# Altium PCB SolarSenseSlave.PcbDoc (part 2 of 2)
Units mm, origin at the board's own origin, x right, y up, seen from the top; angles counter-clockwise.
Board outline 120 x 80 mm, 2 copper layers (Top Layer, Bottom Layer); 75 components, 36 nets, 195 pads, 65 vias.
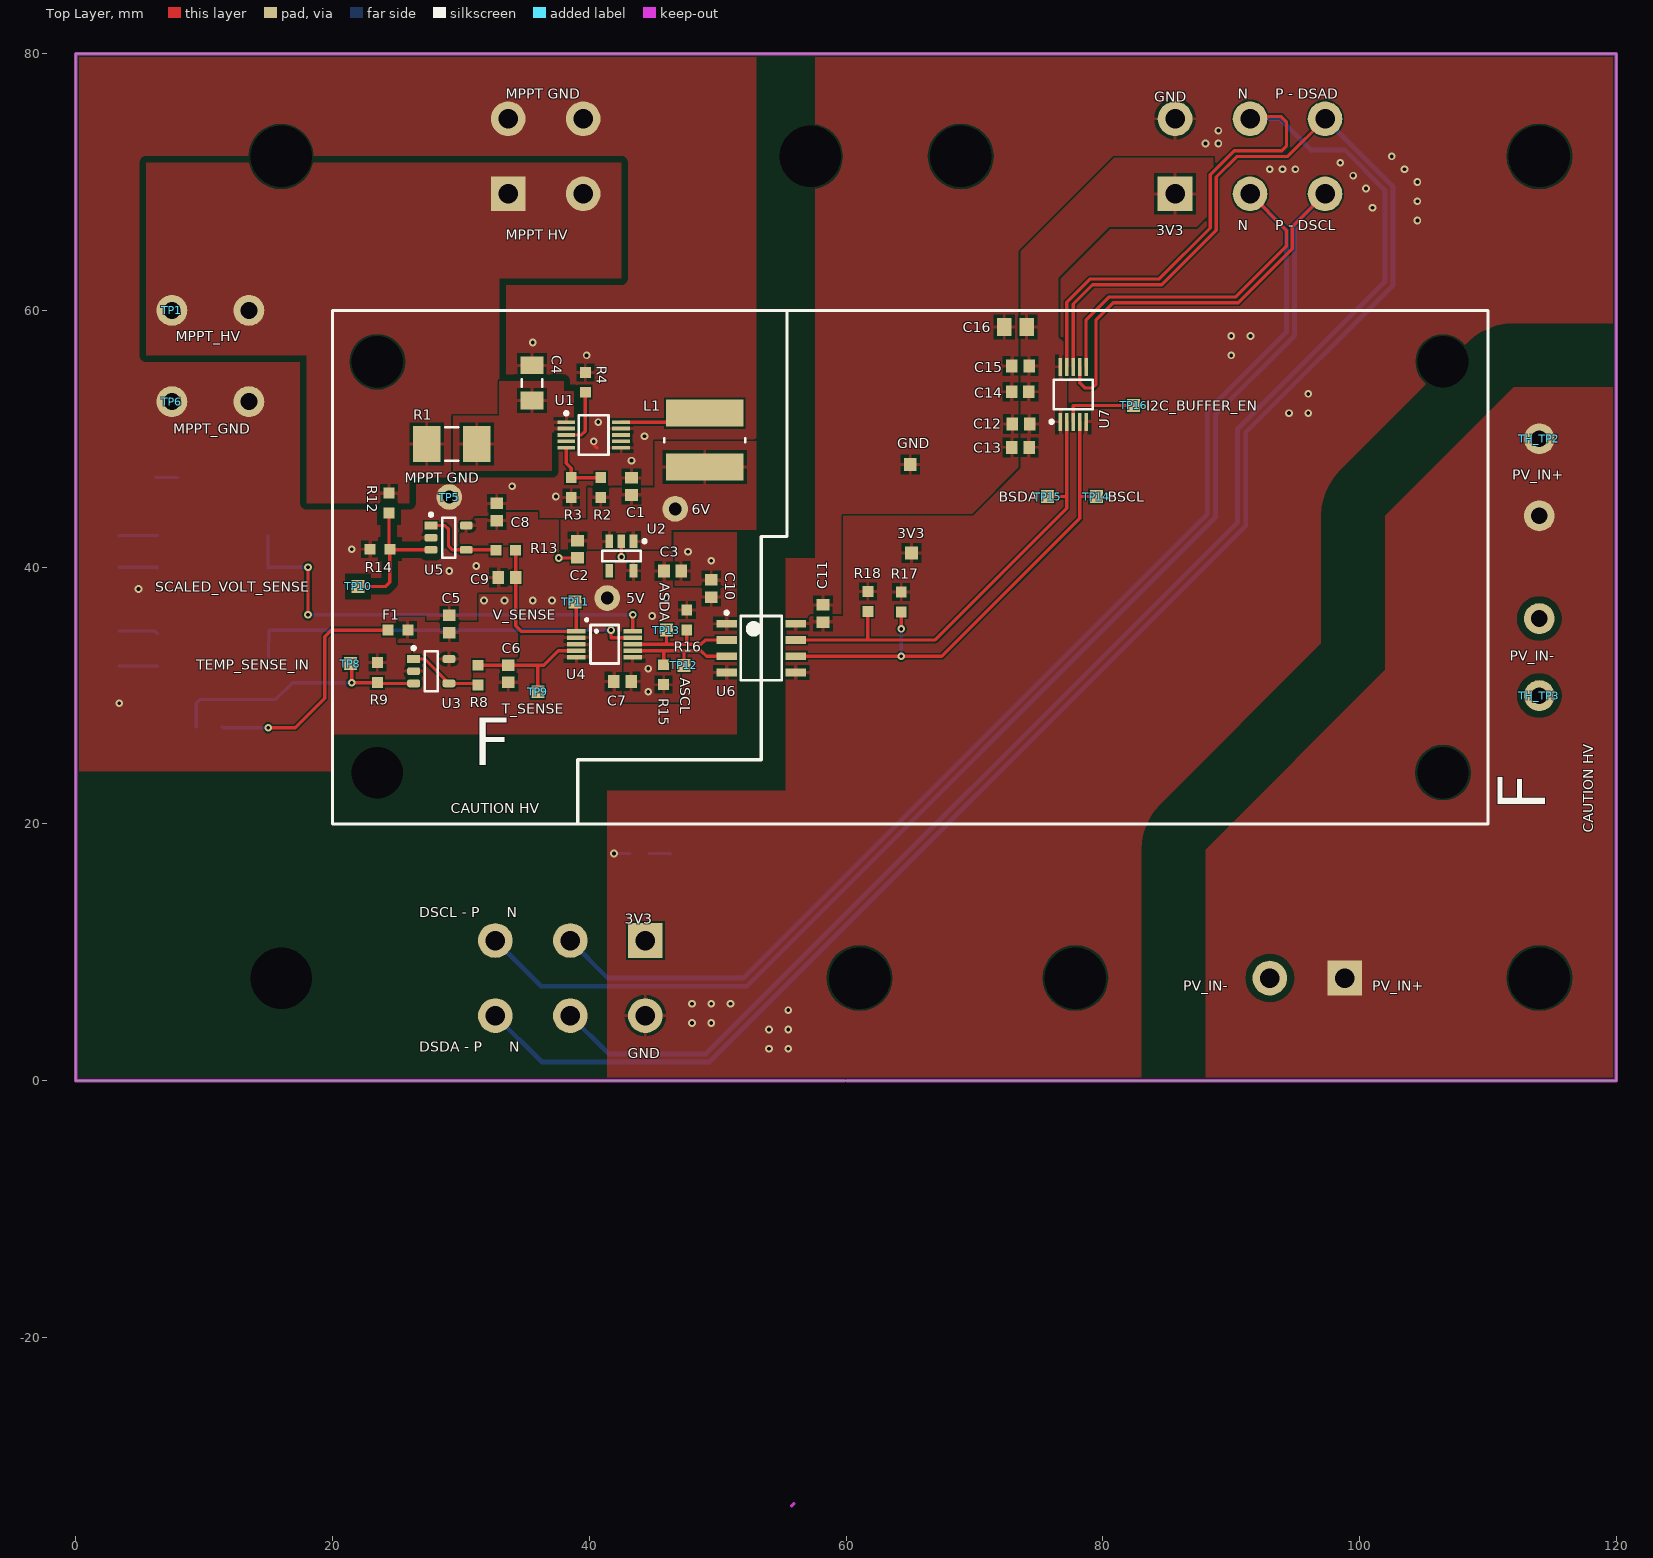
[diagram p0: Top Layer view]

## Polygon pours and split planes (outlines as drawn) (continued)
3V3 on Top Layer "3V3_L01_P067" (solid, pour order 67): 73.6,47.7 69.9,44 59.8,44 59.8,36.2 55.4,36.2 55.4,34.3 66.9,34.3 77.2,44.6 77.2,47.4 77.2,57.264 76.55,57.914 76.55,62.548 80.502,66.5 87.3,66.5 88.6,67.8 88.6,70.498 88.6,71.9 80.9,71.9 73.6,64.6
+6V on Top Layer "+6V_L01_P045" (solid, pour order 45): 46.4,41.4 46.4,42.9 53,42.9 53,49.8 45.1,49.8 45.1,46.2 39.9,46.2 39.9,43.7 37.8,43.7 37.8,41.4
MPPT_HV on Top Layer "MPPT_HV_L01_P047" (solid, pour order 47): 29.5,47 26,47 26,45 18,45 18,56.5 5.5,56.5 5.5,71.5 42.5,71.5 42.5,62.5 33,62.5 33,51.5 29.5,51.5
REG_VIN on Top Layer "REG_VIN_L01_P043" (solid, pour order 43): 29.4,51.8 33,51.8 33,54.5 38,54.5 38,53.7 38.8,53.7 38.8,50.5 37.1,50.5 37.1,47.5 29.4,47.5
GND on Bottom Layer "GND_L02_P083" (solid, pour order 83): 55.3,40.7 57.6,40.7 57.6,80 120,80 120,0 41.4,0 41.4,22.6 55.3,22.6
3V3 on Bottom Layer "3V3_L02_P081" (solid, pour order 81): 52,7 88,43 88,71.5 57.6,71.5 57.6,40.7 55.3,40.7 55.3,22.6 41.4,22.6 41.4,7
MPPT_GND on Bottom Layer "MPPT_GND_L02_P061" (solid, pour order 61): 51.5,27 20,27 20,24.1 0,24.1 0,80 53,80 53,42.9 51.5,42.9
PV_IN- on Bottom Layer "PV_IN-_L02_P071" (solid, pour order 71): 102,44 112,54 120,54 120,44 120,0 88,0 88,18 102,32
MPPT_5V on Bottom Layer "MPPT_5V_L02_P055" (solid, pour order 55): 46.7,36.3 46.7,29.5 43.6,29.5 43.6,36.3 7.6,36.3 7.6,35.025 2.4,35.025 2.4,36.3 2.4,37.1 6,37.1 6,40 2.4,40 2.4,48 5.6,48 5.6,45.2 9.6,45.2 9.6,38.2 39.8,38.2 39.8,39.1 46.7,39.1 46.7,38.2

## Keep-outs
Keep-Out Layer:
  lines w0.254: 55.777,-33.1 55.93,-32.947 ; 59.877,0 0,0 0,80 120,80 120,0 60.03,0

## Silkscreen, mask and mechanical layers (free items; w line width, h text height)
Top Overlay:
  lines w0.254: 39.1,20 39.1,25 53.4,25 53.4,42.4 55.4,42.4 55.4,60 ; 20,20 20,60 110,60 110,20 20,20
  text "MPPT GND" at 33.5,76.5 h0.8
  text "N      P - DSAD" at 90.5,76.5 h0.8
  text "GND" at 84,76.25 h0.8
  text "N      P - DSCL" at 90.5,66.25 h0.8
  text "3V3" at 84.164,65.865 h0.8
  text "MPPT HV" at 33.5,65.5 h0.8
  text "F" at 30.95,23.35 h6.35
  text "F" at 115.683,21.05 h6.35 r90
  text "CAUTION HV" at 29.2,20.85 h0.8
  text "CAUTION HV" at 118.183,19.3 h0.8 r90
  text "DSCL - P      N" at 26.75,12.75 h0.8
  text "3V3" at 42.75,12.25 h0.8
  text "PV_IN-" at 86.25,7 h0.8
  text "PV_IN+" at 101,7 h0.8
  text "DSDA - P      N" at 26.75,2.25 h0.8
  text "GND" at 43,1.75 h0.8
Bottom Overlay:
  circle w0.254: c45,40 r6.25
  circle w0.254: c95,40 r6.25
  circle w0.254: c60,50 r6.25
  circle w0.254: c80,50 r6.25
  lines w0.254: 39.1,20 39.1,25 53.4,25 53.4,42.4 55.4,42.4 55.4,60 ; 20,20 20,60 110,60 110,20 20,20 ; 62.5,25 62.5,40 77.5,40 77.5,25 62.5,25
  text "F" at 4.707,70.499 h6.35 r270
  text "CAUTION HV" at 3.207,67.999 h0.8 r270
  text "MPPT OUTPUT" at 44.5,61.5 h0.8
  text "I2C SIGNAL IN/OUT" at 100,61.5 h0.8
  text "F" at 50.401,54.607 h6.35
  text "CAUTION HV" at 52.901,53.107 h0.8
  text "REV 2.0 / MSXII SOLAR SENSE SLAVE" at 1,46.3 h0.8 r270
  text "MPPT_PWR" at 17,46.3 h0.8
  text "H" at 17.771,42.725 h0.8 r90
  text "ADR1" at 18.222,39.975 h0.8 r270
  text "L" at 16.972,39.725 h0.8 r270
  text "H" at 17.871,35.025 h0.8 r90
  text "L" at 17.072,32.025 h0.8 r270
  text "ADR0" at 18.322,32.025 h0.8 r270
  text "CAUTION HV" at 118.15,27 h0.8 r90
  text "F" at 115.65,25.25 h6.35 r90
  text "MPPT" at 78.5,22.5 h0.8
  text "SOLAR MASTER PWR" at 64.5,16.8 h0.8
  text "SOLAR PANEL INPUT" at 104.5,16.5 h0.8
  text "I2C SIGNAL IN/OUT" at 42.8,16.2 h0.8
  text "F" at 5.2,13.7 h6.35 r270
  text "Do not touch while the board is charged" at 1.9,1.7 h0.8 r270